# Altium PCB PCB1.PcbDoc
Units mm, origin at the board's own origin, x right, y up, seen from the top; angles counter-clockwise.
Board outline 99 x 99 mm, 2 copper layers (Top Layer, Bottom Layer), stack 1.671 mm thick; 28 components, 9 nets, 558 pads, 469 vias.
Unrouted connection lines stored in the file: 3.
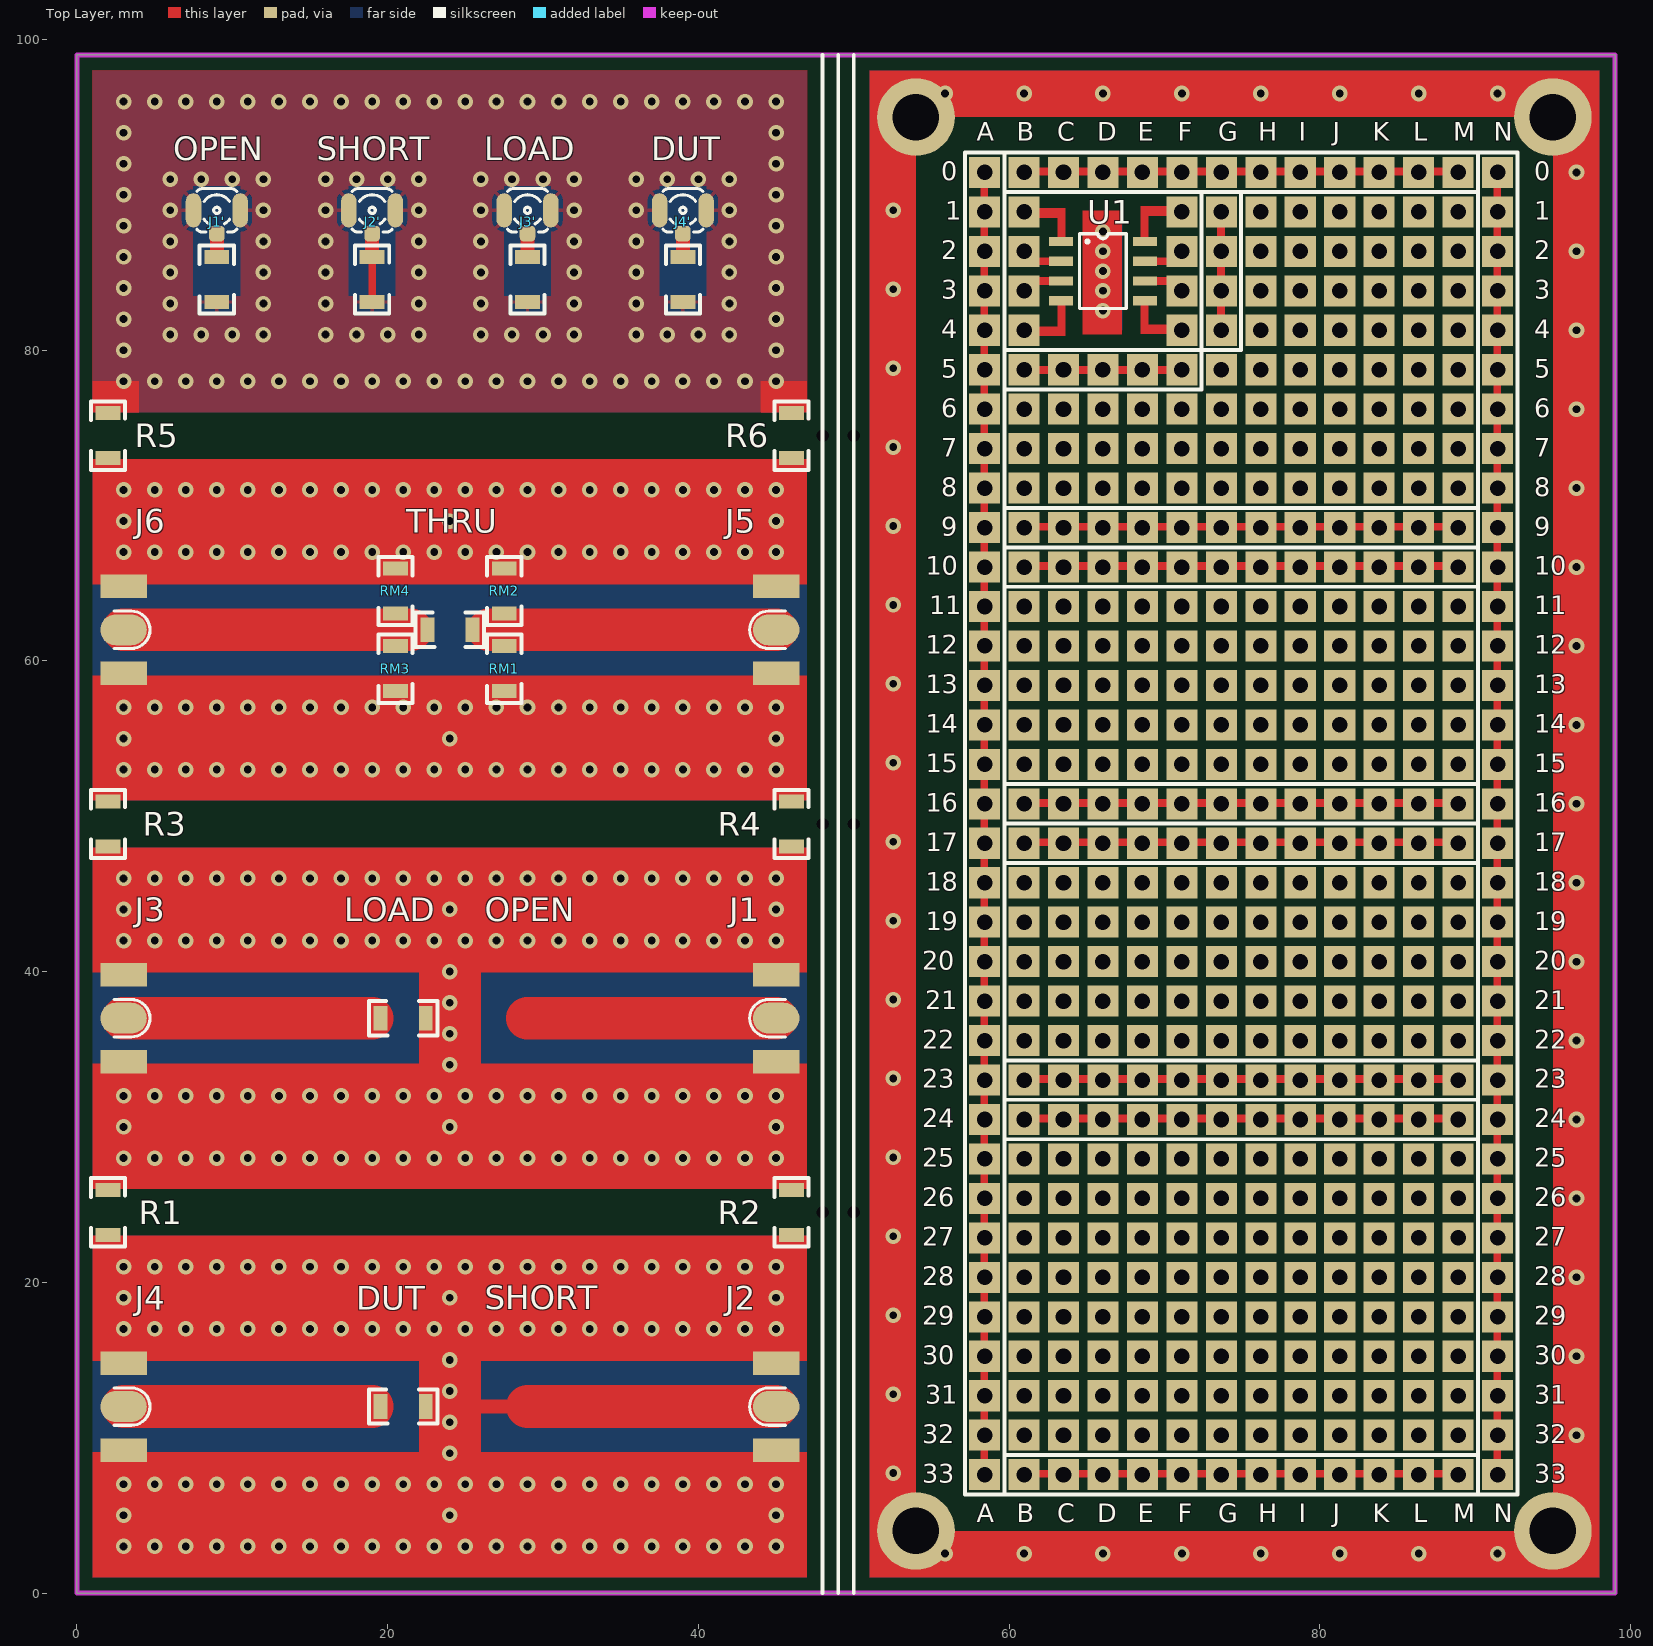
[diagram p0: Top Layer view]
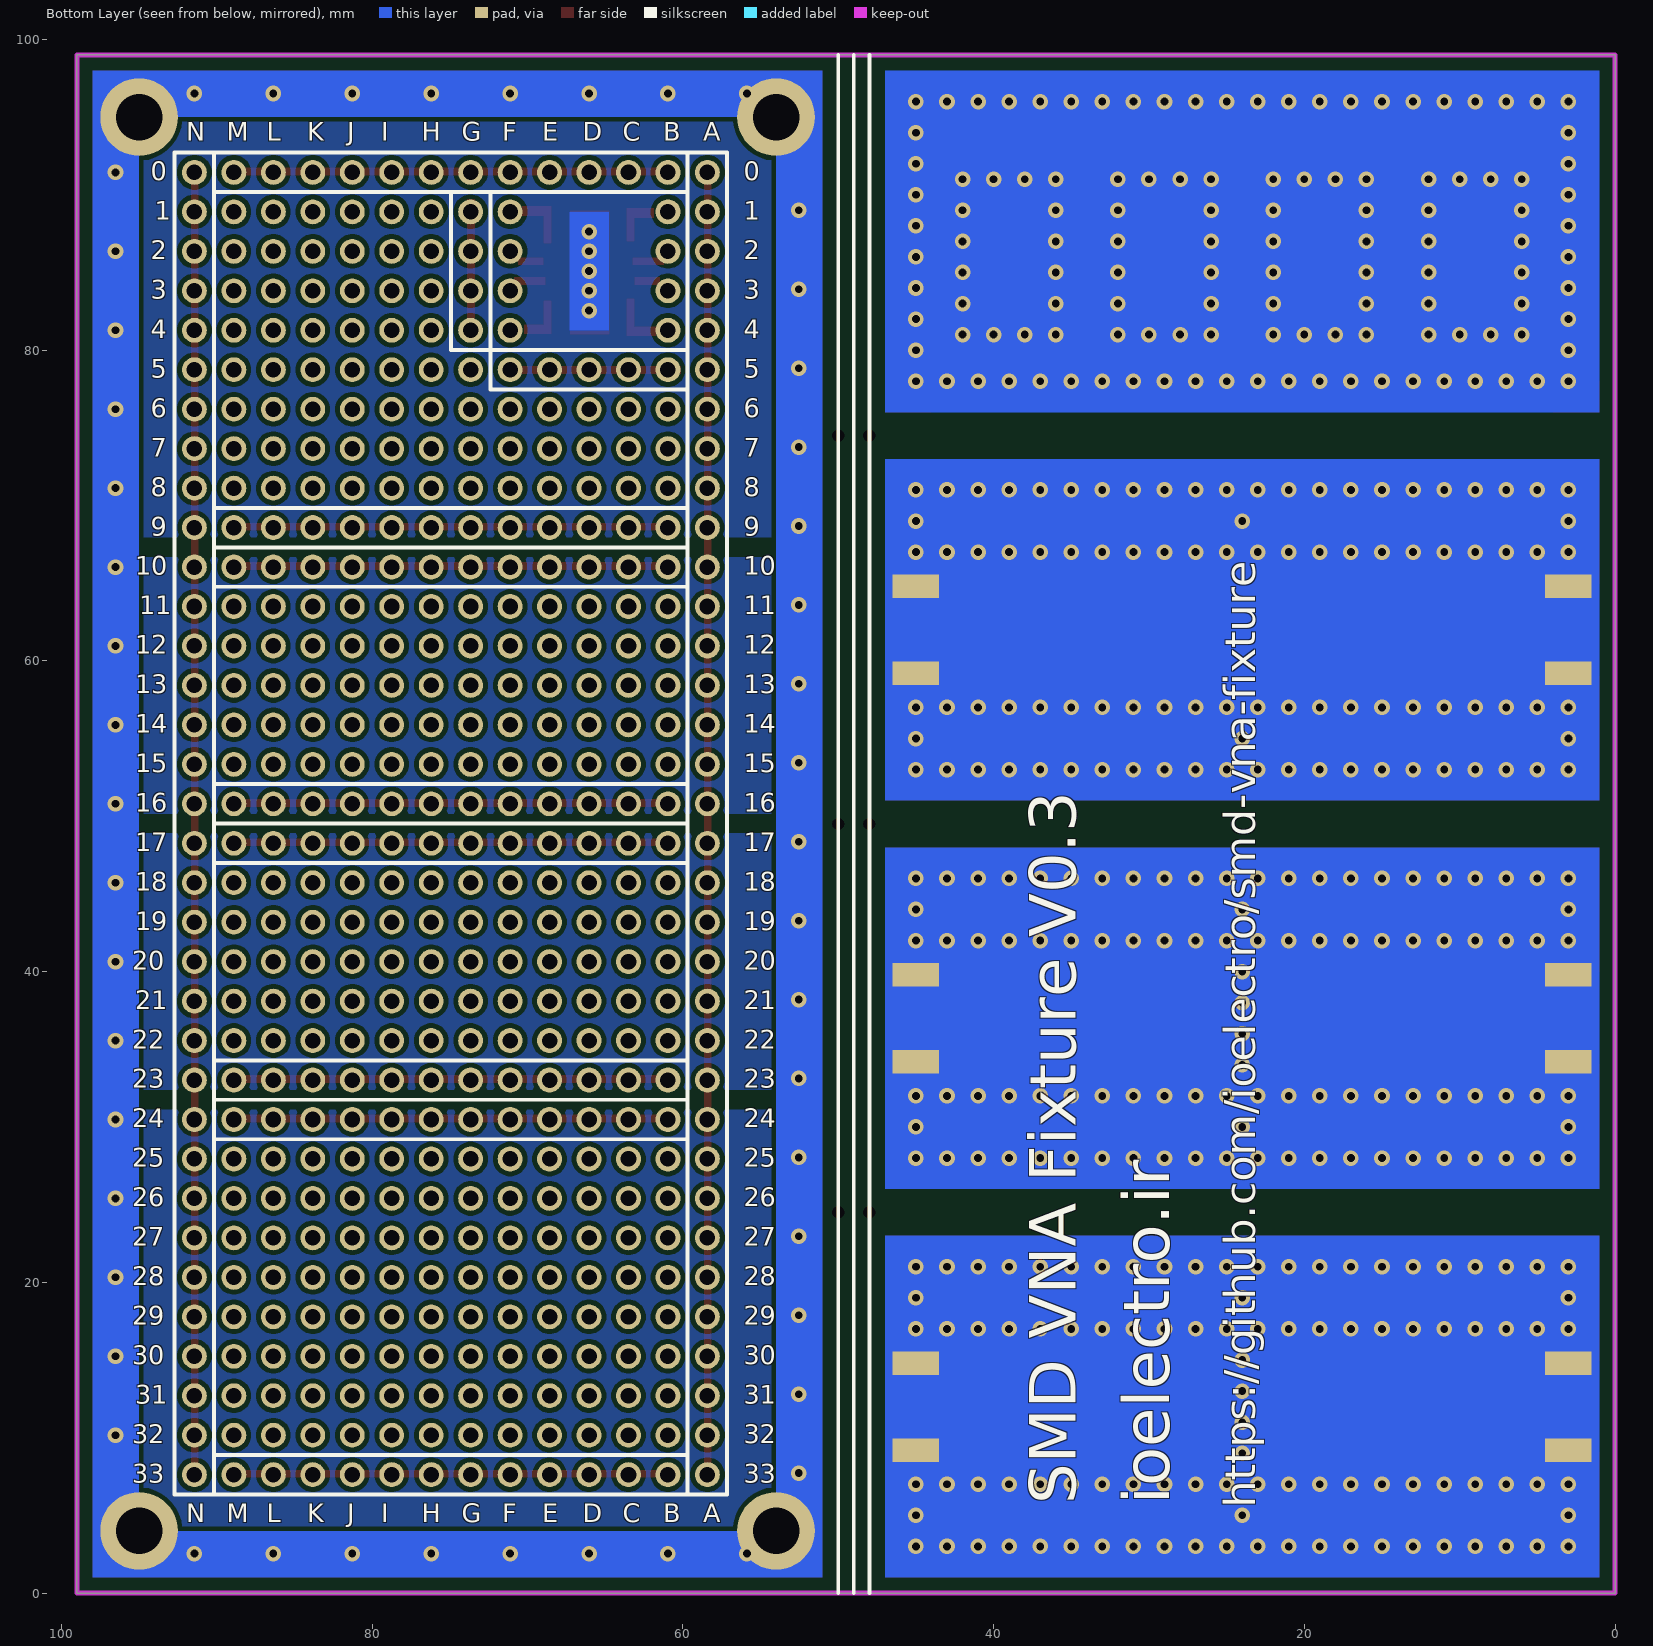
[diagram p1: Bottom Layer view, seen from below]
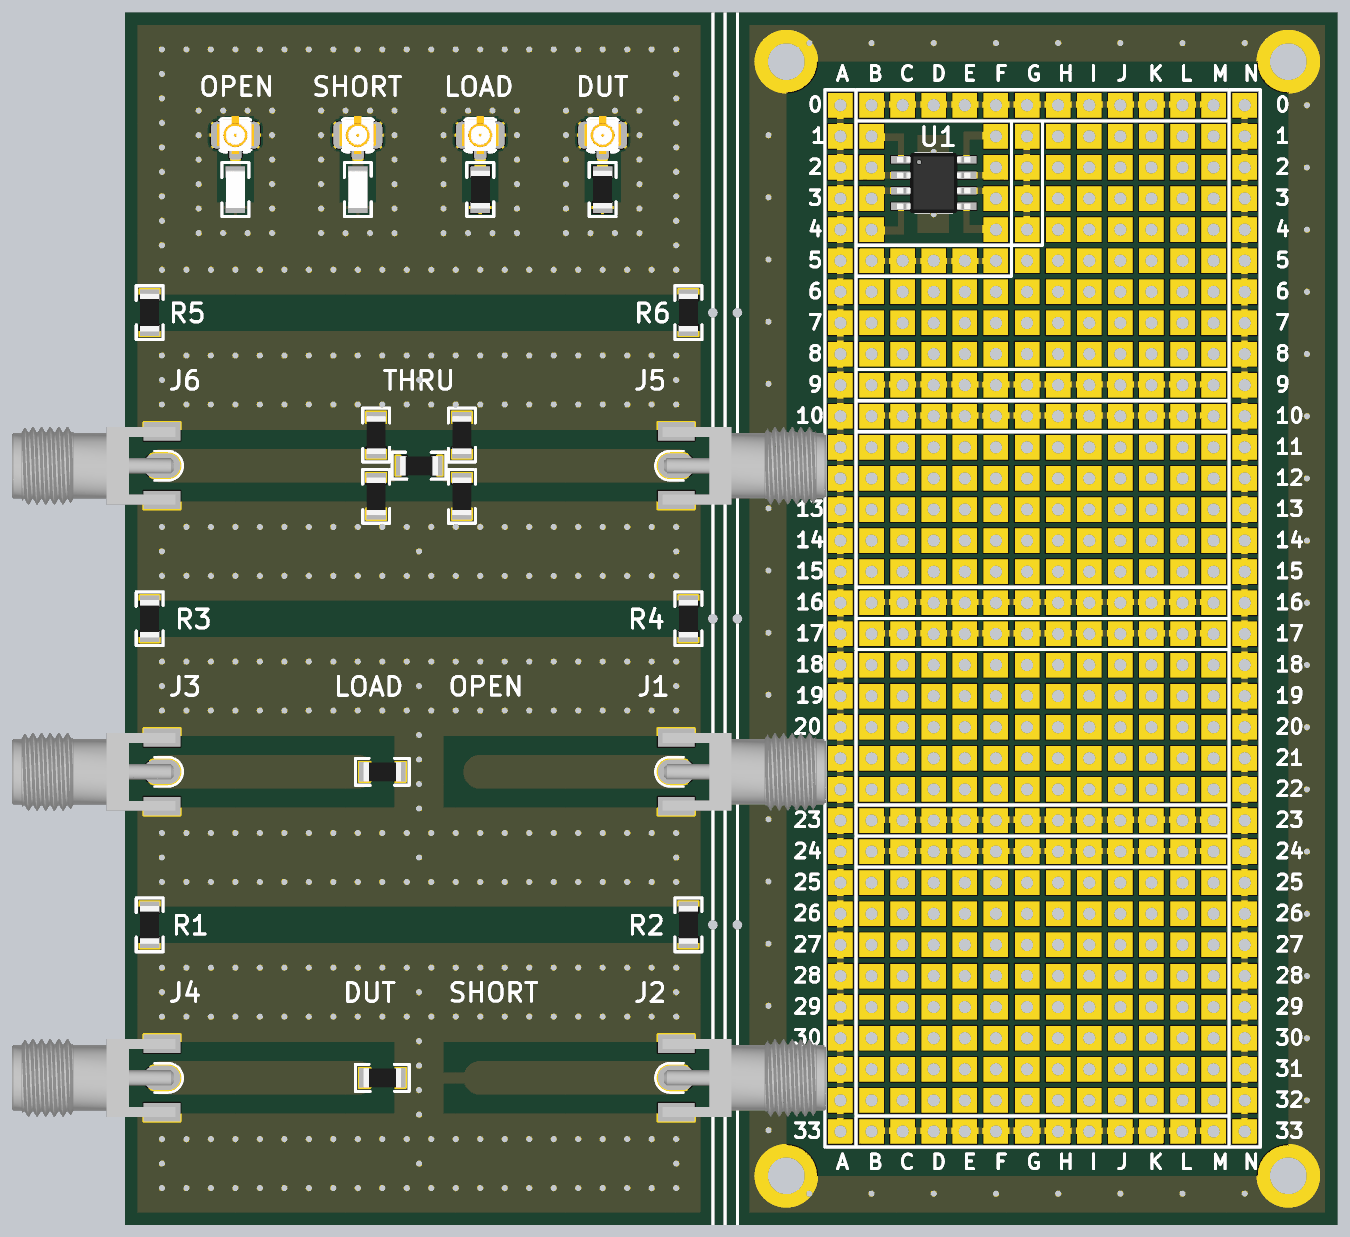
[diagram p2: 3D render of the assembled board from above, using the file's embedded part models]

## Layer stack, top to bottom
Board Layer Stack Top Solder: solder mask 0.0254, SM-001, Dk 4
Top Layer: signal copper 0.0356
Dielectric 1: dielectric 1.6, FR-4, Dk 4.8
Bottom Layer: signal copper 0.0356
Board Layer Stack Bottom Solder: solder mask 0.0254, SM-001, Dk 4

## Board outline
0,0 0,99 99,99 99,0

## Design rules (kind name [scope] priority, off if disabled: settings)
Clearance [All] p1: gap=0.3 ignorepadtopadclearanceinfootprint=FALSE
PolygonConnect [All] p1: thpad.connectstyle=Relief thpad.reliefconductorwidth=0.254 thpad.reliefentries=4 thpad.polygonreliefangle="90 Angle" thpad.airgapwidth=0.254 thpad.conductorbypadedge=TRUE thpad.mindistance=0.381 thpad.enablemindistance=FALSE smdpad.connectstyle=Relief smdpad.reliefconductorwidth=0.254 smdpad.reliefentries=4 smdpad.polygonreliefangle="90 Angle" smdpad.airgapwidth=0.254 smdpad.conductorbypadedge=TRUE smdpad.mindistance=0.381 smdpad.enablemindistance=FALSE via.connectstyle=Direct via.reliefconductorwidth=0.254 via.reliefentries=4 via.polygonreliefangle="90 Angle" via.airgapwidth=0.254
RoutingVias [All] p1: holewidth=0.5 width=1 viastyle="Through Hole" minholewidth=0.5 minwidth=0.7 maxholewidth=10 maxwidth=1.27
SolderMaskExpansion [All] p1: expansion=0.102 istentingtop=FALSE
SupplyNets "Schematic Supply Nets" [InNet('GND')] p1: voltage=0.000
Width [All] p1: maxlimit=1000 minlimit=0.2 preferedwidth=2.754
30 further rules are at their usual default settings.

## Classes and differential pairs
component class Sheet1: DUT J1 J1' J2 J3 J3' J4 J4' J5 J6 LOAD OPEN R1 R2 R3 R4 R5 R6 RM1 RM2 RM3 RM4 SHORT THRU

## Components (designator, comment, footprint, x,y, rotation, side; value= is the part's Value field where it differs from the comment)
DUT "RES" R-1206#1 39,84.55 r270 top (schematic designator DUT')
DUT "RES" R-1206#1 21,12 r180 top
J1 "SMA" SMA_EM 45,37 r270 top
J1' "UFL" UFL 9,89 r0 top
J2 "SMA" SMA_EM 45,12 r270 top
J2' "UFL" UFL 19,89 r0 top
J3 "SMA" SMA_EM 3,37 r90 top
J3' "UFL" UFL 29,89 r0 top
J4 "SMA" SMA_EM 3,12 r90 top
J4' "UFL" UFL 39,89 r0 top
J5 "SMA" SMA_EM 45,62 r270 top
J6 "SMA" SMA_EM 3,62 r90 top
LOAD "RES" R-1206#1 29,84.55 r270 top (schematic designator LOAD')
LOAD "RES" R-1206#1 21,37 r180 top
OPEN "RES" R-1206#2 9,84.55 r270 top (schematic designator OPEN')
R1 "RES" R-1206#1 2,24.5 r90 top
R2 "RES" R-1206#1 46,24.5 r90 top
R3 "RES" R-1206#1 2,49.5 r90 top
R4 "RES" R-1206#1 46,49.5 r90 top
R5 "RES" R-1206#1 2,74.5 r90 top
R6 "RES" R-1206#1 46,74.5 r90 top
RM1 "RES" R-1206#1 27.5,59.5 r270 top
RM2 "RES" R-1206#1 27.5,64.5 r270 top
RM3 "RES" R-1206#1 20.5,59.5 r270 top
RM4 "RES" R-1206#1 20.5,64.5 r270 top
SHORT "RES" R-1206#2 19,84.55 r90 top (schematic designator SHORT')
THRU "RES" R-1206#1 24,62 r180 top
U1 "LM358D" SOIC-8 66.04,85.09 r0 top

## Footprints (in the part's own frame and the unit in brackets; to place one, negate y for a bottom-side part, rotate by r counter-clockwise, add the part's x,y. Pads: shape width x height; smd on the part's side, far side on the other; paste and mask are expansions set on the pad)
R-1206#1 [mm]
  rect 0.9x1.6 smd: 1(-1.45,0) 2(1.45,0)
  silkscreen extent -2.2,-1.1 2.2,1.1, body extent -1.55,-0.77 1.55,0.78, height 0.55
R-1206#2 [mm]
  rect 0.9x1.6 smd mask+0.102: 1(-1.45,0) 2(1.45,0)
  silkscreen extent -2.2,-1.1 2.2,1.1, body extent -1.55,-0.77 1.55,0.78, height 0.55
SMA_EM [mm] "SMA-J-P-H-ST-EM1 edge mounting"
  oval 2x3 smd: 1(0,0)
  rect 1.5x3 smd: 2(-2.8,0) 3(2.8,0)
  rect 1.5x3 smd far side: 4(-2.8,0) 5(2.8,0)
  silkscreen extent -1.2,-1.7 1.2,0.6, body extent -3.18,-1.1 3.17,12.23, height 3.51
SOIC-8 [mm]
  rect 1.55x0.6 smd: 1(-2.7,1.905) 2(-2.7,0.635) 3(-2.7,-0.635) 4(-2.7,-1.905) 5(2.7,-1.905) 6(2.7,-0.635) 7(2.7,0.635) 8(2.7,1.905)
  silkscreen extent -1.5,-2.4 1.5,2.4, body extent -3,-2.45 3,2.45, height 1.7
UFL [mm] "CONN RF, COAX UP, U.FL-R-SMT-1 2.8x2.8mm"
  rrect50% 1x1 smd: 1(0,-1.5)
  oval 1x2.2 smd: 2(-1.5,0) 3(1.5,0)
  silkscreen extent -1.28,-1.4 1.28,1.4, body extent -1.5,-1.55 1.5,1.55, height 1.25

## Part data
J1: library part SMA-CONNECTOR, "Straight SMA Connector", Package=None, Availability=Unavailable, MP=altium_native_batch, Price=None
J1' J2' J3' J4': "UFL Connector", Package=None, Availability=Unavailable, MP=altium_native_batch, Price=None
J2 J3 J4 J5 J6: "SMA Connector", Package=None, Availability=Unavailable, MP=altium_native_batch, Price=None
U1: "Amplifier;  Dual Operational;  +/- 16 or 32V;  0.7 mA (Typ.) Supply;  +32V;  SO-8;  0", Case/Package=SOIC, Dual Supply Voltage=9V, Input Bias Current=150nA, Input Offset Voltage (Vos)=7mV, Manufacturer=STMicroelectronics, Max Dual Supply Voltage=15V, Max Input Voltage=28.5V, Max Operating Temperature=70°C, Max Supply Voltage=30V, Min Dual Supply Voltage=1.5V, Min Input Voltage=0V, Min Operating Temperature=0°C, Min Supply Voltage=3V, Nominal Supply Current=1.2mA, Operating Supply Current=700uA, Output Current=40mA, Output Current per Channel=60mA, Package Quantity=100, Supplier Part Number 1=497-18378-ND, Voltage Gain=100dB, Amplifier Type="GENERAL PURPOSE", Bandwidth=1.1MHz, Category="Amplifiers - Op Amps, Buffer, Instrumentation", Common Mode Rejection Ratio=70dB, ComponentLink1Description=https://datasheet.ciiva.com/14151/jhlm258-e-14151238.pdf?src-supplier=Distrelec, ComponentLink1URL=https://datasheet.ciiva.com/14151/jhlm258-e-14151238.pdf?src-supplier=Distrelec, ComponentLink2Description=https://datasheet.ciiva.com/27746/82-0322-27746345.pdf?src-supplier=Rapid+Electronics, ComponentLink2URL=https://datasheet.ciiva.com/27746/82-0322-27746345.pdf?src-supplier=Rapid+Electronics, ComponentLink3Description=https://datasheet.ciiva.com/15129/getdatasheetpartid-50655-15129974.pdf?src-supplier=Verical, ComponentLink3URL=https://datasheet.ciiva.com/15129/getdatasheetpartid-50655-15129974.pdf?src-supplier=Verical, ComponentLink4Description=https://datasheet.ciiva.com/29306/155598-da-01-en-op-verst-lm358d-stm-29306828.pdf?src-supplier=Conrad, ComponentLink4URL=https://datasheet.ciiva.com/29306/155598-da-01-en-op-verst-lm358d-stm-29306828.pdf?src-supplier=Conrad, ComponentLink5Description=https://datasheet.ciiva.com/14544/70013561-14544765.pdf?src-supplier=Allied+Electronics, ComponentLink5URL=https://datasheet.ciiva.com/14544/70013561-14544765.pdf?src-supplier=Allied+Electronics, ComponentLink6Description=https://datasheet.ciiva.com/16456/cd00000464-16456953.pdf?src-supplier=Future+Electronics, ComponentLink6URL=https://datasheet.ciiva.com/16456/cd00000464-16456953.pdf?src-supplier=Future+Electronics, ComponentLink7Description=https://datasheet.ciiva.com/1811/cd00000464-1811312.pdf?src-supplier=Digi-Key, ComponentLink7URL=https://datasheet.ciiva.com/1811/cd00000464-1811312.pdf?src-supplier=Digi-Key, Gain Bandwidth Product=1.1MHz, Height=1.25mm, Input Offset Voltage-Max=7mV, Lead Free="Lead Free", Length=4.9mm, Manufacturer Part Number=LM358D, Mount="Surface Mount", Number of Amplifiers=2, Number of Channels=2, Number of Circuits=2, Number of Elements=2, Number of Pins=8, Operating Supply Voltage=15V, Packaging=Rail/Tube, Pricing 1="1=2/81000, 10=2/52300, 25=2/38480, 100=2/06700, 250=1/96100, 500=1/75960, 1000=1/75000 (USD)", Radiation Hardening=No, REACH SVHC="No SVHC", RoHS=Yes, RoHS Compliant=Yes, Series=-, Slew Rate=0.6V/µs, Slew Rate-Nom=0.6V/µs, Stock 1=36148, Supplier 1=Digi-Key, Supply Current=1.2mA, Technology=BIPOLAR, Unity Gain Bandwidth Product=1.1MHz, Weight=0.01lb, Width=3.9mm

## Free pads (board coordinates)
  rect 2x2 / inner rect 1.6x1.6 / far side round 1.6 hole 1 mask+0.102: 0(58.42,7.62) 0(58.42,10.16) 0(58.42,12.7) 0(58.42,15.24) 0(58.42,17.78) 0(58.42,20.32) 0(58.42,22.86) 0(58.42,25.4) 0(58.42,27.94) 0(58.42,30.48) 0(58.42,33.02) 0(58.42,35.56) 0(58.42,38.1) 0(58.42,40.64) 0(58.42,43.18) 0(58.42,45.72) 0(58.42,48.26) 0(58.42,50.8) 0(58.42,53.34) 0(58.42,55.88) 0(58.42,58.42) 0(58.42,60.96) 0(58.42,63.5) 0(58.42,66.04) 0(58.42,68.58) 0(58.42,71.12) 0(58.42,73.66) 0(58.42,76.2) 0(58.42,78.74) 0(58.42,81.28) 0(58.42,83.82) 0(58.42,86.36) 0(58.42,88.9) 0(58.42,91.44) 9(60.96,7.62) 9(60.96,10.16) 9(60.96,12.7) 9(60.96,15.24) 9(60.96,17.78) 9(60.96,20.32) 9(60.96,22.86) 9(60.96,25.4) 9(60.96,27.94) 9(60.96,30.48) 9(60.96,33.02) 9(60.96,35.56) 9(60.96,38.1) 9(60.96,40.64) 9(60.96,43.18) 9(60.96,45.72) 9(60.96,48.26) 9(60.96,50.8) 9(60.96,53.34) 9(60.96,55.88) 9(60.96,58.42) 9(60.96,60.96) 9(60.96,63.5) 9(60.96,66.04) 9(60.96,68.58) 9(60.96,71.12) 9(60.96,73.66) 9(60.96,76.2) 9(60.96,78.74) 9(60.96,81.28) 9(60.96,83.82) 9(60.96,86.36) 9(60.96,88.9) 9(60.96,91.44) 10(63.5,7.62) 10(63.5,10.16) 10(63.5,12.7) 10(63.5,15.24) 10(63.5,17.78) 10(63.5,20.32) 10(63.5,22.86) 10(63.5,25.4) 10(63.5,27.94) 10(63.5,30.48) 10(63.5,33.02) 10(63.5,35.56) 10(63.5,38.1) 10(63.5,40.64) 10(63.5,43.18) 10(63.5,45.72) 10(63.5,48.26) 10(63.5,50.8) 10(63.5,53.34) 10(63.5,55.88) 10(63.5,58.42) 10(63.5,60.96) 10(63.5,63.5) 10(63.5,66.04) 10(63.5,68.58) 10(63.5,71.12) 10(63.5,73.66) 10(63.5,76.2) 10(63.5,78.74) 10(63.5,91.44) 11(66.04,7.62) 11(66.04,10.16) 11(66.04,12.7) 11(66.04,15.24) 11(66.04,17.78) 11(66.04,20.32) 11(66.04,22.86) 11(66.04,25.4) 11(66.04,27.94) 11(66.04,30.48) 11(66.04,33.02) 11(66.04,35.56) 11(66.04,38.1) 11(66.04,40.64) 11(66.04,43.18) 11(66.04,45.72) 11(66.04,48.26) 11(66.04,50.8) 11(66.04,53.34) 11(66.04,55.88) 11(66.04,58.42) 11(66.04,60.96) 11(66.04,63.5) 11(66.04,66.04) 11(66.04,68.58) 11(66.04,71.12) 11(66.04,73.66) 11(66.04,76.2) 11(66.04,78.74) 11(66.04,91.44) 12(68.58,7.62) 12(68.58,10.16) 12(68.58,12.7) 12(68.58,15.24) 12(68.58,17.78) 12(68.58,20.32) 12(68.58,22.86) 12(68.58,25.4) 12(68.58,27.94) 12(68.58,30.48) 12(68.58,33.02) 12(68.58,35.56) 12(68.58,38.1) 12(68.58,40.64) 12(68.58,43.18) 12(68.58,45.72) 12(68.58,48.26) 12(68.58,50.8) 12(68.58,53.34) 12(68.58,55.88) 12(68.58,58.42) 12(68.58,60.96) 12(68.58,63.5) 12(68.58,66.04) 12(68.58,68.58) 12(68.58,71.12) 12(68.58,73.66) 12(68.58,76.2) 12(68.58,78.74) 12(68.58,91.44) 13(71.12,7.62) 13(71.12,10.16) 13(71.12,12.7) 13(71.12,15.24) 13(71.12,17.78) 13(71.12,20.32) 13(71.12,22.86) 13(71.12,25.4) 13(71.12,27.94) 13(71.12,30.48) 13(71.12,33.02) 13(71.12,35.56) 13(71.12,38.1) 13(71.12,40.64) 13(71.12,43.18) 13(71.12,45.72) 13(71.12,48.26) 13(71.12,50.8) 13(71.12,53.34) 13(71.12,55.88) 13(71.12,58.42) 13(71.12,60.96) 13(71.12,63.5) 13(71.12,66.04) 13(71.12,68.58) 13(71.12,71.12) 13(71.12,73.66) 13(71.12,76.2) 13(71.12,78.74) 13(71.12,81.28) 13(71.12,83.82) 13(71.12,86.36) 13(71.12,88.9) 13(71.12,91.44) 14(73.66,7.62) 14(73.66,10.16) 14(73.66,12.7) 14(73.66,15.24) 14(73.66,17.78) 14(73.66,20.32) 14(73.66,22.86) 14(73.66,25.4) 14(73.66,27.94) 14(73.66,30.48) 14(73.66,33.02) 14(73.66,35.56) 14(73.66,38.1) 14(73.66,40.64) 14(73.66,43.18) 14(73.66,45.72) 14(73.66,48.26) 14(73.66,50.8) 14(73.66,53.34) 14(73.66,55.88) 14(73.66,58.42) 14(73.66,60.96) 14(73.66,63.5) 14(73.66,66.04) 14(73.66,68.58) 14(73.66,71.12) 14(73.66,73.66) 14(73.66,76.2) 14(73.66,78.74) 14(73.66,81.28) 14(73.66,83.82) 14(73.66,86.36) 14(73.66,88.9) 14(73.66,91.44) 16(76.2,7.62) 16(76.2,10.16) 16(76.2,12.7) 16(76.2,15.24) 16(76.2,17.78) 16(76.2,20.32) 16(76.2,22.86) 16(76.2,25.4) 16(76.2,27.94) 16(76.2,30.48) 16(76.2,33.02) 16(76.2,35.56) 16(76.2,38.1) 16(76.2,40.64) 16(76.2,43.18) 16(76.2,45.72) 16(76.2,48.26) 16(76.2,50.8) 16(76.2,53.34) 16(76.2,55.88) 16(76.2,58.42) 16(76.2,60.96) 16(76.2,63.5) 16(76.2,66.04) 16(76.2,68.58) 16(76.2,71.12) 16(76.2,73.66) 16(76.2,76.2) 16(76.2,78.74) 16(76.2,81.28) 16(76.2,83.82) 16(76.2,86.36) 16(76.2,88.9) 16(76.2,91.44) 17(78.74,7.62) 17(78.74,10.16) 17(78.74,12.7) 17(78.74,15.24) 17(78.74,17.78) 17(78.74,20.32) 17(78.74,22.86) 17(78.74,25.4) 17(78.74,27.94) 17(78.74,30.48) 17(78.74,33.02) 17(78.74,35.56) 17(78.74,38.1) 17(78.74,40.64) 17(78.74,43.18) 17(78.74,45.72) 17(78.74,48.26) 17(78.74,50.8) 17(78.74,53.34) 17(78.74,55.88) 17(78.74,58.42) 17(78.74,60.96) 17(78.74,63.5) 17(78.74,66.04) 17(78.74,68.58) 17(78.74,71.12) 17(78.74,73.66) 17(78.74,76.2) 17(78.74,78.74) 17(78.74,81.28) 17(78.74,83.82) 17(78.74,86.36) 17(78.74,88.9) 17(78.74,91.44) 18(81.28,7.62) 18(81.28,10.16) 18(81.28,12.7) 18(81.28,15.24) 18(81.28,17.78) 18(81.28,20.32) 18(81.28,22.86) 18(81.28,25.4) 18(81.28,27.94) 18(81.28,30.48) 18(81.28,33.02) 18(81.28,35.56) 18(81.28,38.1) 18(81.28,40.64) 18(81.28,43.18) 18(81.28,45.72) 18(81.28,48.26) 18(81.28,50.8) 18(81.28,53.34) 18(81.28,55.88) 18(81.28,58.42) 18(81.28,60.96) 18(81.28,63.5) 18(81.28,66.04) 18(81.28,68.58) 18(81.28,71.12) 18(81.28,73.66) 18(81.28,76.2) 18(81.28,78.74) 18(81.28,81.28) 18(81.28,83.82) 18(81.28,86.36) 18(81.28,88.9) 18(81.28,91.44) 19(83.82,7.62) 19(83.82,10.16) 19(83.82,12.7) 19(83.82,15.24) 19(83.82,17.78) 19(83.82,20.32) 19(83.82,22.86) 19(83.82,25.4) 19(83.82,27.94) 19(83.82,30.48) 19(83.82,33.02) 19(83.82,35.56) 19(83.82,38.1) 19(83.82,40.64) 19(83.82,43.18) 19(83.82,45.72) 19(83.82,48.26) 19(83.82,50.8) 19(83.82,53.34) 19(83.82,55.88) 19(83.82,58.42) 19(83.82,60.96) 19(83.82,63.5) 19(83.82,66.04) 19(83.82,68.58) 19(83.82,71.12) 19(83.82,73.66) 19(83.82,76.2) 19(83.82,78.74) 19(83.82,81.28) 19(83.82,83.82) 19(83.82,86.36) 19(83.82,88.9) 19(83.82,91.44) 20(86.36,7.62) 20(86.36,10.16) 20(86.36,12.7) 20(86.36,15.24) 20(86.36,17.78) 20(86.36,20.32) 20(86.36,22.86) 20(86.36,25.4) 20(86.36,27.94) 20(86.36,30.48) 20(86.36,33.02) 20(86.36,35.56) 20(86.36,38.1) 20(86.36,40.64) 20(86.36,43.18) 20(86.36,45.72) 20(86.36,48.26) 20(86.36,50.8) 20(86.36,53.34) 20(86.36,55.88) 20(86.36,58.42) 20(86.36,60.96) 20(86.36,63.5) 20(86.36,66.04) 20(86.36,68.58) 20(86.36,71.12) 20(86.36,73.66) 20(86.36,76.2) 20(86.36,78.74) 20(86.36,81.28) 20(86.36,83.82) 20(86.36,86.36) 20(86.36,88.9) 20(86.36,91.44) 21(88.9,7.62) 21(88.9,10.16) 21(88.9,12.7) 21(88.9,15.24) 21(88.9,17.78) 21(88.9,20.32) 21(88.9,22.86) 21(88.9,25.4) 21(88.9,27.94) 21(88.9,30.48) 21(88.9,33.02) 21(88.9,35.56) 21(88.9,38.1) 21(88.9,40.64) 21(88.9,43.18) 21(88.9,45.72) 21(88.9,48.26) 21(88.9,50.8) 21(88.9,53.34) 21(88.9,55.88) 21(88.9,58.42) 21(88.9,60.96) 21(88.9,63.5) 21(88.9,66.04) 21(88.9,68.58) 21(88.9,71.12) 21(88.9,73.66) 21(88.9,76.2) 21(88.9,78.74) 21(88.9,81.28) 21(88.9,83.82) 21(88.9,86.36) 21(88.9,88.9) 21(88.9,91.44) 22(91.44,7.62) 22(91.44,10.16) 22(91.44,12.7) 22(91.44,15.24) 22(91.44,17.78) 22(91.44,20.32) 22(91.44,22.86) 22(91.44,25.4) 22(91.44,27.94) 22(91.44,30.48) 22(91.44,33.02) 22(91.44,35.56) 22(91.44,38.1) 22(91.44,40.64) 22(91.44,43.18) 22(91.44,45.72) 22(91.44,48.26) 22(91.44,50.8) 22(91.44,53.34) 22(91.44,55.88) 22(91.44,58.42) 22(91.44,60.96) 22(91.44,63.5) 22(91.44,66.04) 22(91.44,68.58) 22(91.44,71.12) 22(91.44,73.66) 22(91.44,76.2) 22(91.44,78.74) 22(91.44,81.28) 22(91.44,83.82) 22(91.44,86.36) 22(91.44,88.9) 22(91.44,91.44)
  round 5 hole 3 mask+0.102: 1(54,95) 2(95,95) 3(54,4) 4(95,4)
  rect 0x0 hole 0.8 unplated mask+0.102: 69(48,74.5) 70(48,49.5) 71(48,24.5) 82(50,74.5) 83(50,49.5) 84(50,24.5)

## Via types
v1: diameter 1, hole 0.5, Top Layer to Bottom Layer, tented both sides, 469 vias

## Nets (pads, with @x,y where several pads share a name; then routed paths per layer and width w, separated by ;. In a path a pad name is that pad's centre, name@x,y a point inside that pad or via, vN(x,y) a via of type N, cw(c..) or ccw(c..) an arc to the next point about the centre after c; other vN are vias at no path point)
GND: DUT.1@22.45,12 DUT.2@39,83.1 J1'.2 J1'.3 J1.2 J1.3 J1.4 J1.5 J2'.1 J2'.2 J2'.3 J2.1 J2.2 J2.3 J2.4 J2.5 J3'.2 J3'.3 J3.2 J3.3 J3.4 J3.5 J4'.2 J4'.3 J4.2 J4.3 J4.4 J4.5 J5.2 J5.3 J5.4 J5.5 J6.2 J6.3 J6.4 J6.5 LOAD.1@22.45,37 LOAD.2@29,83.1 OPEN.2 R1.1 R1.2 R2.1 R2.2 R3.1 R3.2 R4.1 R4.2 R5.1 R5.2 R6.1 R6.2 RM1.2 RM2.1 RM3.2 RM4.1 SHORT.1 SHORT.2 | length 24.4
  Top Layer w0.5: SHORT.1 SHORT.2
  Top Layer w0.9: SHORT.2 J2'.1 ; 25,12 29,12
  Top Layer w2.754: 29,12 J2.1
  other v1: 3,3 5,3 7,3 9,3 11,3 13,3 15,3 17,3 19,3 21,3 23,3 25,3 27,3 29,3 31,3 33,3 35,3 37,3 39,3 41,3 43,3 45,3 3,5 24,5 45,5 3,7 5,7 7,7 9,7 11,7 13,7 15,7 17,7 19,7 21,7 23,7 25,7 27,7 29,7 31,7 33,7 35,7 37,7 39,7 41,7 43,7 45,7 24,9 24,11 24,13 24,15 3,17 5,17 7,17 9,17 11,17 13,17 15,17 17,17 19,17 21,17 23,17 25,17 27,17 29,17 31,17 33,17 35,17 37,17 39,17 41,17 43,17 45,17 3,19 24,19 45,19 3,21 5,21 7,21 9,21 11,21 13,21 15,21 17,21 19,21 21,21 23,21 25,21 27,21 29,21 31,21 33,21 35,21 37,21 39,21 41,21 43,21 45,21 3,28 5,28 7,28 9,28 11,28 13,28 15,28 17,28 19,28 21,28 23,28 25,28 27,28 29,28 31,28 33,28 35,28 37,28 39,28 41,28 43,28 45,28 3,30 24,30 45,30 3,32 5,32 7,32 9,32 11,32 13,32 15,32 17,32 19,32 21,32 23,32 25,32 27,32 29,32 31,32 33,32 35,32 37,32 39,32 41,32 43,32 45,32 24,34 24,36 24,38 24,40 3,42 5,42 7,42 9,42 11,42 13,42 15,42 17,42 19,42 21,42 23,42 25,42 27,42 29,42 31,42 33,42 35,42 37,42 39,42 41,42 43,42 45,42 3,44 24,44 45,44 3,46 5,46 7,46 9,46 11,46 13,46 15,46 17,46 19,46 21,46 23,46 25,46 27,46 29,46 31,46 33,46 35,46 37,46 39,46 41,46 43,46 45,46 3,53 5,53 7,53 9,53 11,53 13,53 15,53 17,53 19,53 21,53 23,53 25,53 27,53 29,53 31,53 33,53 35,53 37,53 39,53 41,53 43,53 45,53 3,55 24,55 45,55 3,57 5,57 7,57 9,57 11,57 13,57 15,57 17,57 19,57 21,57 23,57 25,57 27,57 29,57 31,57 33,57 35,57 37,57 39,57 41,57 43,57 45,57 3,67 5,67 7,67 9,67 11,67 13,67 15,67 17,67 19,67 21,67 23,67 25,67 27,67 29,67 31,67 33,67 35,67 37,67 39,67 41,67 43,67 45,67 3,69 24,69 45,69 3,71 5,71 7,71 9,71 11,71 13,71 15,71 17,71 19,71 21,71 23,71 25,71 27,71 29,71 31,71 33,71 35,71 37,71 39,71 41,71 43,71 45,71 3,78 5,78 7,78 9,78 11,78 13,78 15,78 17,78 19,78 21,78 23,78 25,78 27,78 29,78 31,78 33,78 35,78 37,78 39,78 41,78 43,78 45,78 3,80 45,80 6,81 8,81 10,81 12,81 16,81 18,81 20,81 22,81 26,81 28,81 30,81 32,81 36,81 38,81 40,81 42,81 3,82 45,82 6,83 12,83 16,83 22,83 26,83 32,83 36,83 42,83 3,84 45,84 6,85 12,85 16,85 22,85 26,85 32,85 36,85 42,85 3,86 45,86 6,87 12,87 16,87 22,87 26,87 32,87 36,87 42,87 3,88 45,88 6,89 12,89 16,89 22,89 26,89 32,89 36,89 42,89 3,90 45,90 6,91 8,91 10,91 12,91 16,91 18,91 20,91 22,91 26,91 28,91 30,91 32,91 36,91 38,91 40,91 42,91 3,92 45,92 3,94 45,94 3,96 5,96 7,96 9,96 11,96 13,96 15,96 17,96 19,96 21,96 23,96 25,96 27,96 29,96 31,96 33,96 35,96 37,96 39,96 41,96 43,96 45,96
NetDUT_1: DUT.1@39,86 J4'.1 | length 1.5
  Top Layer w0.9: DUT.1@39,86 J4'.1
NetDUT_2: DUT.2@19.55,12 J4.1 | length 16
  Top Layer w2.754: J4.1 19,12
NetJ1'_1: J1'.1 OPEN.1 | length 1.5
  Top Layer w0.9: OPEN.1 J1'.1
NetJ3'_1: J3'.1 LOAD.1@29,86 | length 1.5
  Top Layer w0.9: LOAD.1@29,86 J3'.1
NetJ3_1: J3.1 LOAD.2@19.55,37 | length 16
  Top Layer w2.754: J3.1 19,37
NetJ5_1: J5.1 RM1.1 RM2.2 THRU.1 | length 18.5
  Top Layer w2.754: 26.5,62 J5.1
NetJ6_1: J6.1 RM3.1 RM4.2 THRU.2 | length 18.5
  Top Layer w2.754: J6.1 21.5,62
NetOpen: J1.1 | length 16
  Top Layer w2.754: 29,37 J1.1
pads on no net: U1.1 U1.2 U1.3 U1.4 U1.5 U1.6 U1.7 U1.8
copper on no net:
  other v1: 55.88,2.54 60.96,2.54 66.04,2.54 71.12,2.54 76.2,2.54 81.28,2.54 86.36,2.54 91.44,2.54 52.54,7.72 96.52,10.16 52.54,12.8 96.52,15.24 52.54,17.88 96.52,20.32 52.54,22.96 96.52,25.4 52.54,28.04 96.52,30.48 52.54,33.12 96.52,35.56 52.54,38.2 96.52,40.64 52.54,43.28 96.52,45.72 52.54,48.36 96.52,50.8 52.54,53.44 96.52,55.88 52.54,58.52 96.52,60.96 52.54,63.6 96.52,66.04 52.54,68.68 96.52,71.12 52.54,73.76 96.52,76.2 52.54,78.84 96.52,81.28 66.04,82.55 66.04,83.82 52.54,83.92 66.04,85.09 66.04,86.36 96.52,86.36 66.04,87.63 52.54,89 96.52,91.44 55.88,96.52 60.96,96.52 66.04,96.52 71.12,96.52 76.2,96.52 81.28,96.52 86.36,96.52 91.44,96.52

## Polygon pours and split planes (outlines as drawn)
GND on Top Layer "GND_L01_P000" (solid, pour order 0): 1,98 47,98 47,76 1,76
no net on Bottom Layer "NONET_L02_P001" (solid, pour order 1): 52.705,96.52 52.705,67.945 95.885,67.945 95.885,96.52
no net on Bottom Layer "NONET_L02_P004" (solid, pour order 4): 52.705,48.895 52.705,32.385 95.885,32.385 95.885,48.895
no net on Bottom Layer "NONET_L02_P003" (solid, pour order 3): 53.17,31.115 53.17,2.54 96.35,2.54 96.35,31.115
no net on Bottom Layer "NONET_L02_P002" (solid, pour order 2): 52.705,66.675 52.705,50.165 95.885,50.165 95.885,66.675

## Keep-outs
Keep-Out Layer:
  the board outline again, w0.3

## Other copper
Top Layer:
  region: 71.12,78.47 71.12,78.97 60.13,78.97 60.13,78.47
  rectangle: 64.73,81 67.27,89
  rectangle: 73.39,81.28 73.89,89.73
  region: 70.231,81.661 68.453,81.661 68.453,81.026 70.231,81.026
  region: 68.961,83.185 68.453,83.185 68.453,81.153 68.961,81.153
  region: 70.866,84.709 68.834,84.709 68.834,84.201 70.866,84.201
  region: 70.612,85.979 68.961,85.979 68.961,85.471 70.612,85.471
  region: 68.961,89.027 68.453,89.027 68.453,86.868 68.961,86.868
  region: 70.358,89.281 68.453,89.281 68.453,88.646 70.358,88.646
  rectangle: 61.722,80.899 63.627,81.534
  rectangle: 63.119,81.153 63.627,83.312
  rectangle: 61.468,84.201 63.119,84.709
  rectangle: 61.214,85.471 63.246,85.979
  rectangle: 63.119,86.995 63.627,89.027
  rectangle: 61.849,88.519 63.627,89.154
  rectangle net GND: 44,76 47,78
  rectangle net GND: 1,76 4,78
  rectangle: 60.96,30.29 88.9,30.79
  rectangle: 60.96,32.83 88.9,33.33
  rectangle: 60.96,48.07 88.9,48.57
  rectangle: 60.96,50.61 88.9,51.11
  rectangle: 60.96,65.85 88.9,66.35
  rectangle: 60.96,68.39 88.9,68.89
  rectangle: 60.96,7.43 88.9,7.93
  rectangle: 60.96,91.25 88.9,91.75
  rectangle: 91.17,7.493 91.67,91
  rectangle: 58.15,7.366 58.65,91
  rectangle: 51,1 54,98
  rectangle: 51,95 98,98
  rectangle: 95,1 98,98
  rectangle: 51,1 98,4
  rectangle net GND: 1,51 47,59.073
  region net GND: 47,73 1,73 1,64.927 47,64.927
  rectangle net GND: 1,26 47,34.073
  region net GND: 47,48 1,48 1,39.927 47,39.927
  rectangle net GND: 22,33 26,41
  rectangle net GND: 22,8 26,16
  region net GND: 47,23 1,23 1,14.927 47,14.927
  rectangle net GND: 1,1 47,9.073
  pour cut-out: 37.5,90.562 37.5,83.5 40.5,83.5 40.5,90.562
  pour cut-out: 27.5,90.562 27.5,83.5 30.5,83.5 30.5,90.562
  pour cut-out: 17.5,90.562 17.5,83.5 20.5,83.5 20.5,90.562
  pour cut-out: 7.5,90.562 7.5,83.5 10.5,83.5 10.5,90.562
Bottom Layer:
  rectangle: 64.77,81.28 67.31,88.9
  rectangle: 51,1 54,98
  rectangle: 51,1 98,4
  rectangle: 95,1 98,98
  rectangle: 51,95 98,98
  rectangle net GND: 1,76 47,98
  rectangle net GND: 1,51 47,73
  rectangle net GND: 1,1 47,23
  rectangle net GND: 1,26 47,48

## Silkscreen, mask and mechanical layers (free items; w line width, h text height)
Single Layer Stack Top Overlay:
  lines w0.254: 48,0 48,99 ; 49,0 49,99 ; 50,0 50,99 ; 59.69,8.89 90.17,8.89 ; 59.69,29.21 90.17,29.21 ; 59.69,46.99 90.17,46.99 90.17,49.53 ; 59.69,64.77 90.17,64.77 ; 59.69,77.47 59.944,77.47 72.136,77.47 72.39,77.47 72.39,80.01 72.39,90.17 ; 59.69,80.01 74.93,80.01 74.93,80.264 74.93,89.662 74.93,89.916 74.93,90.17 ; 59.69,90.17 90.17,90.17 ; 59.69,92.71 59.69,6.35 ; 90.17,31.75 89.916,31.75 59.944,31.75 59.69,31.75 59.69,34.29 90.17,34.29 ; 59.69,6.35 59.944,6.35 89.916,6.35 ; 59.69,6.35 57.15,6.35 57.15,6.604 57.15,92.456 57.15,92.71 59.944,92.71 89.916,92.71 ; 89.916,6.35 92.71,6.35 92.71,6.604 92.71,92.456 92.71,92.71 89.916,92.71 ; 89.916,6.35 90.17,6.35 90.17,8.89 ; 89.916,49.53 90.17,49.53 ; 89.916,49.53 90.17,49.53 ; 89.916,49.53 59.944,49.53 59.69,49.53 59.69,52.07 90.17,52.07 90.17,49.53 ; 89.916,92.71 90.17,92.71 90.17,8.89 ; 59.69,67.31 59.69,69.85 90.17,69.85 90.17,67.31 89.916,67.31 59.944,67.31 59.69,67.31
  text "A" at 57.908,93.468 h1.2
  text "B" at 60.498,93.468 h1.2
  text "C" at 63.089,93.468 h1.2
  text "D" at 65.679,93.468 h1.2
  text "E" at 68.269,93.468 h1.2
  text "F" at 70.859,93.468 h1.2
  text "G" at 73.45,93.468 h1.2
  text "H" at 76.04,93.468 h1.2
  text "I" at 78.63,93.468 h1.2
  text "J" at 80.821,93.468 h1.2
  text "K" at 83.411,93.468 h1.2
  text "L" at 86.001,93.468 h1.2
  text "M" at 88.592,93.468 h1.2
  text "N" at 91.182,93.468 h1.2
  text "0" at 55.622,90.928 h1.2
  text "0" at 93.792,90.928 h1.2
  text "1" at 55.876,88.388 h1.2
  text "1" at 93.792,88.388 h1.2
  text "2" at 55.622,85.848 h1.2
  text "2" at 93.792,85.848 h1.2
  text "3" at 55.622,83.308 h1.2
  text "3" at 93.792,83.308 h1.2
  text "4" at 55.622,80.768 h1.2
  text "4" at 93.792,80.768 h1.2
  text "5" at 55.622,78.228 h1.2
  text "5" at 93.792,78.228 h1.2
  text "6" at 55.622,75.688 h1.2
  text "6" at 93.792,75.688 h1.2
  text "7" at 55.622,73.148 h1.2
  text "7" at 93.792,73.148 h1.2
  text "8" at 55.622,70.608 h1.2
  text "8" at 93.792,70.608 h1.2
  text "9" at 55.622,68.068 h1.2
  text "9" at 93.792,68.068 h1.2
  text "10" at 54.622,65.528 h1.2
  text "10" at 93.792,65.528 h1.2
  text "11" at 54.86,62.988 h1.2
  text "11" at 93.792,62.988 h1.2
  text "12" at 54.622,60.448 h1.2
  text "12" at 93.792,60.448 h1.2
  text "13" at 54.622,57.908 h1.2
  text "13" at 93.792,57.908 h1.2
  text "14" at 54.622,55.368 h1.2
  text "14" at 93.792,55.368 h1.2
  text "15" at 54.622,52.828 h1.2
  text "15" at 93.792,52.828 h1.2
  text "16" at 54.622,50.288 h1.2
  text "16" at 93.792,50.288 h1.2
  text "17" at 54.622,47.748 h1.2
  text "17" at 93.792,47.748 h1.2
  text "18" at 54.622,45.208 h1.2
  text "18" at 93.792,45.208 h1.2
  text "OPEN" at 26.254,43.254 h1.52
  text "19" at 54.622,42.668 h1.2
  text "19" at 93.792,42.668 h1.2
  text "20" at 54.422,40.128 h1.2
  text "20" at 93.792,40.128 h1.2
  text "21" at 54.606,37.588 h1.2
  text "21" at 93.792,37.588 h1.2
  text "22" at 54.422,35.048 h1.2
  text "22" at 93.792,35.048 h1.2
  text "23" at 54.422,32.508 h1.2
  text "23" at 93.792,32.508 h1.2
  text "24" at 54.422,29.968 h1.2
  text "24" at 93.792,29.968 h1.2
  text "25" at 54.422,27.428 h1.2
  text "25" at 93.792,27.428 h1.2
  text "26" at 54.422,24.888 h1.2
  text "26" at 93.792,24.888 h1.2
  text "27" at 54.422,22.348 h1.2
  text "27" at 93.792,22.348 h1.2
  text "28" at 54.422,19.808 h1.2
  text "28" at 93.792,19.808 h1.2
  text "SHORT" at 26.254,18.254 h1.52
  text "29" at 54.422,17.268 h1.2
  text "29" at 93.792,17.268 h1.2
  text "30" at 54.422,14.728 h1.2
  text "30" at 93.792,14.728 h1.2
  text "31" at 54.606,12.188 h1.2
  text "31" at 93.792,12.188 h1.2
  text "32" at 54.422,9.648 h1.2
  text "32" at 93.792,9.648 h1.2
  text "33" at 54.422,7.108 h1.2
  text "33" at 93.792,7.108 h1.2
  text "A" at 57.908,4.568 h1.2
  text "B" at 60.498,4.568 h1.2
  text "C" at 63.089,4.568 h1.2
  text "D" at 65.679,4.568 h1.2
  text "E" at 68.269,4.568 h1.2
  text "F" at 70.859,4.568 h1.2
  text "G" at 73.45,4.568 h1.2
  text "H" at 76.04,4.568 h1.2
  text "I" at 78.63,4.568 h1.2
  text "J" at 80.821,4.568 h1.2
  text "K" at 83.411,4.568 h1.2
  text "L" at 86.001,4.568 h1.2
  text "M" at 88.592,4.568 h1.2
  text "N" at 91.182,4.568 h1.2
Board Layer Stack Bottom Overlay:
  lines w0.254: 48,0 48,99 ; 49,0 49,99 ; 50,0 50,99 ; 59.69,8.89 90.17,8.89 ; 59.69,29.21 90.17,29.21 ; 59.69,46.99 90.17,46.99 90.17,49.53 ; 59.69,64.77 90.17,64.77 ; 59.69,77.47 59.944,77.47 72.136,77.47 72.39,77.47 72.39,80.01 72.39,90.17 ; 59.69,80.01 74.93,80.01 74.93,80.264 74.93,89.662 74.93,89.916 74.93,90.17 ; 59.69,90.17 90.17,90.17 ; 59.69,92.71 59.69,6.35 ; 90.17,31.75 89.916,31.75 59.944,31.75 59.69,31.75 59.69,34.29 90.17,34.29 ; 59.69,6.35 57.15,6.35 57.15,6.604 57.15,92.456 57.15,92.71 59.944,92.71 89.916,92.71 ; 59.69,6.35 59.944,6.35 89.916,6.35 ; 89.916,6.35 90.17,6.35 90.17,8.89 ; 89.916,6.35 92.71,6.35 92.71,6.604 92.71,92.456 92.71,92.71 89.916,92.71 ; 89.916,49.53 59.944,49.53 59.69,49.53 59.69,52.07 90.17,52.07 90.17,49.53 ; 89.916,49.53 90.17,49.53 ; 89.916,49.53 90.17,49.53 ; 89.916,92.71 90.17,92.71 90.17,8.89 ; 59.69,67.31 59.944,67.31 89.916,67.31 90.17,67.31 90.17,69.85 59.69,69.85 59.69,67.31
  text "A" at 58.678,93.468 h1.2
  text "B" at 61.268,93.468 h1.2
  text "C" at 63.859,93.468 h1.2
  text "D" at 66.449,93.468 h1.2
  text "E" at 69.039,93.468 h1.2
  text "F" at 71.629,93.468 h1.2
  text "G" at 74.22,93.468 h1.2
  text "H" at 76.81,93.468 h1.2
  text "I" at 79.4,93.468 h1.2
  text "J" at 81.591,93.468 h1.2
  text "K" at 84.181,93.468 h1.2
  text "L" at 86.771,93.468 h1.2
  text "M" at 89.362,93.468 h1.2
  text "N" at 91.952,93.468 h1.2
  text "0" at 56.068,90.928 h1.2
  text "0" at 94.238,90.928 h1.2
  text "1" at 56.068,88.388 h1.2
  text "1" at 93.984,88.388 h1.2
  text "2" at 56.068,85.848 h1.2
  text "2" at 94.238,85.848 h1.2
  text "3" at 56.068,83.308 h1.2
  text "3" at 94.238,83.308 h1.2
  text "4" at 56.068,80.768 h1.2
  text "4" at 94.238,80.768 h1.2
  text "5" at 56.068,78.228 h1.2
  text "5" at 94.238,78.228 h1.2
  text "6" at 56.068,75.688 h1.2
  text "6" at 94.238,75.688 h1.2
  text "7" at 56.068,73.148 h1.2
  text "7" at 94.238,73.148 h1.2
  text "8" at 56.068,70.608 h1.2
  text "8" at 94.238,70.608 h1.2
  text "9" at 56.068,68.068 h1.2
  text "9" at 94.238,68.068 h1.2
  text "10" at 56.068,65.528 h1.2
  text "10" at 95.238,65.528 h1.2
  text "11" at 56.068,62.988 h1.2
  text "11" at 95,62.988 h1.2
  text "12" at 56.068,60.448 h1.2
  text "12" at 95.238,60.448 h1.2
  text "13" at 56.068,57.908 h1.2
  text "13" at 95.238,57.908 h1.2
  text "14" at 56.068,55.368 h1.2
  text "14" at 95.238,55.368 h1.2
  text "15" at 56.068,52.828 h1.2
  text "15" at 95.238,52.828 h1.2
  text "16" at 56.068,50.288 h1.2
  text "16" at 95.238,50.288 h1.2
  text "17" at 56.068,47.748 h1.2
  text "17" at 95.238,47.748 h1.2
  text "18" at 56.068,45.208 h1.2
  text "18" at 95.238,45.208 h1.2
  text "19" at 56.068,42.668 h1.2
  text "19" at 95.238,42.668 h1.2
  text "20" at 56.068,40.128 h1.2
  text "20" at 95.438,40.128 h1.2
  text "21" at 56.068,37.588 h1.2
  text "21" at 95.254,37.588 h1.2
  text "22" at 56.068,35.048 h1.2
  text "22" at 95.438,35.048 h1.2
  text "23" at 56.068,32.508 h1.2
  text "23" at 95.438,32.508 h1.2
  text "24" at 56.068,29.968 h1.2
  text "24" at 95.438,29.968 h1.2
  text "25" at 56.068,27.428 h1.2
  text "25" at 95.438,27.428 h1.2
  text "26" at 56.068,24.888 h1.2
  text "26" at 95.438,24.888 h1.2
  text "27" at 56.068,22.348 h1.2
  text "27" at 95.438,22.348 h1.2
  text "28" at 56.068,19.808 h1.2
  text "28" at 95.438,19.808 h1.2
  text "29" at 56.068,17.268 h1.2
  text "29" at 95.438,17.268 h1.2
  text "30" at 56.068,14.728 h1.2
  text "30" at 95.438,14.728 h1.2
  text "31" at 56.068,12.188 h1.2
  text "31" at 95.254,12.188 h1.2
  text "32" at 56.068,9.648 h1.2
  text "32" at 95.438,9.648 h1.2
  text "33" at 56.068,7.108 h1.2
  text "33" at 95.438,7.108 h1.2
  text "ioelectro.ir" at 28.7,5.7 h3 r270
  text "SMD VNA Fixture V0.3" at 34.7,5.7 h3 r270
  text "https://github.com/ioelectro/smd-vna-fixture" at 23.166,5.5 h2 r270
  text "A" at 58.678,4.568 h1.2
  text "B" at 61.268,4.568 h1.2
  text "C" at 63.859,4.568 h1.2
  text "D" at 66.449,4.568 h1.2
  text "E" at 69.039,4.568 h1.2
  text "F" at 71.629,4.568 h1.2
  text "G" at 74.22,4.568 h1.2
  text "H" at 76.81,4.568 h1.2
  text "I" at 79.4,4.568 h1.2
  text "J" at 81.591,4.568 h1.2
  text "K" at 84.181,4.568 h1.2
  text "L" at 86.771,4.568 h1.2
  text "M" at 89.362,4.568 h1.2
  text "N" at 91.952,4.568 h1.2
Board Layer Stack Bottom Solder:
  region: 56,17.512 56,19.036 52,19.036 52,17.512
  region: 97,17.512 97,19.036 93,19.036 93,17.512
  region: 56,39.116 56,40.64 52,40.64 52,39.116
  region: 97,39.116 97,40.64 93,40.64 93,39.116
  region: 56,56.896 56,58.42 52,58.42 52,56.896
  region: 97,56.896 97,58.42 93,58.42 93,56.896
  region: 97,79.756 97,81.28 93,81.28 93,79.756
  region: 56,79.756 56,81.28 52,81.28 52,79.756
  region: 75.692,6 74.168,6 74.168,2 75.692,2
  rectangle: 74.168,93 75.692,97
Mechanical 1:
  lines w0.254: 50,-1 50,102 ; 0,0 0,100 100,100 100,0 0,0
Mechanical 3:
  lines w0.254: -15,24 54,24 ; -15,25 54,25 ; -15,49 54,49 ; -15,74 54,74 ; -15,75 54,75 ; 24,-3.5 24,56 ; 24,21.5 24,105 ; 48,-2 48,53 ; 48,49.5 102,49.5 ; -15,50 54,50 -15,50